# Altium PCB 新主控制.PcbDoc (part 3 of 3)
Units mil, origin at the board's own origin, x right, y up, seen from the top; angles counter-clockwise.
Board outline 9070 x 4900 mil, 2 copper layers (Top Layer, Bottom Layer); 275 components, 202 nets, 862 pads, 116 vias.
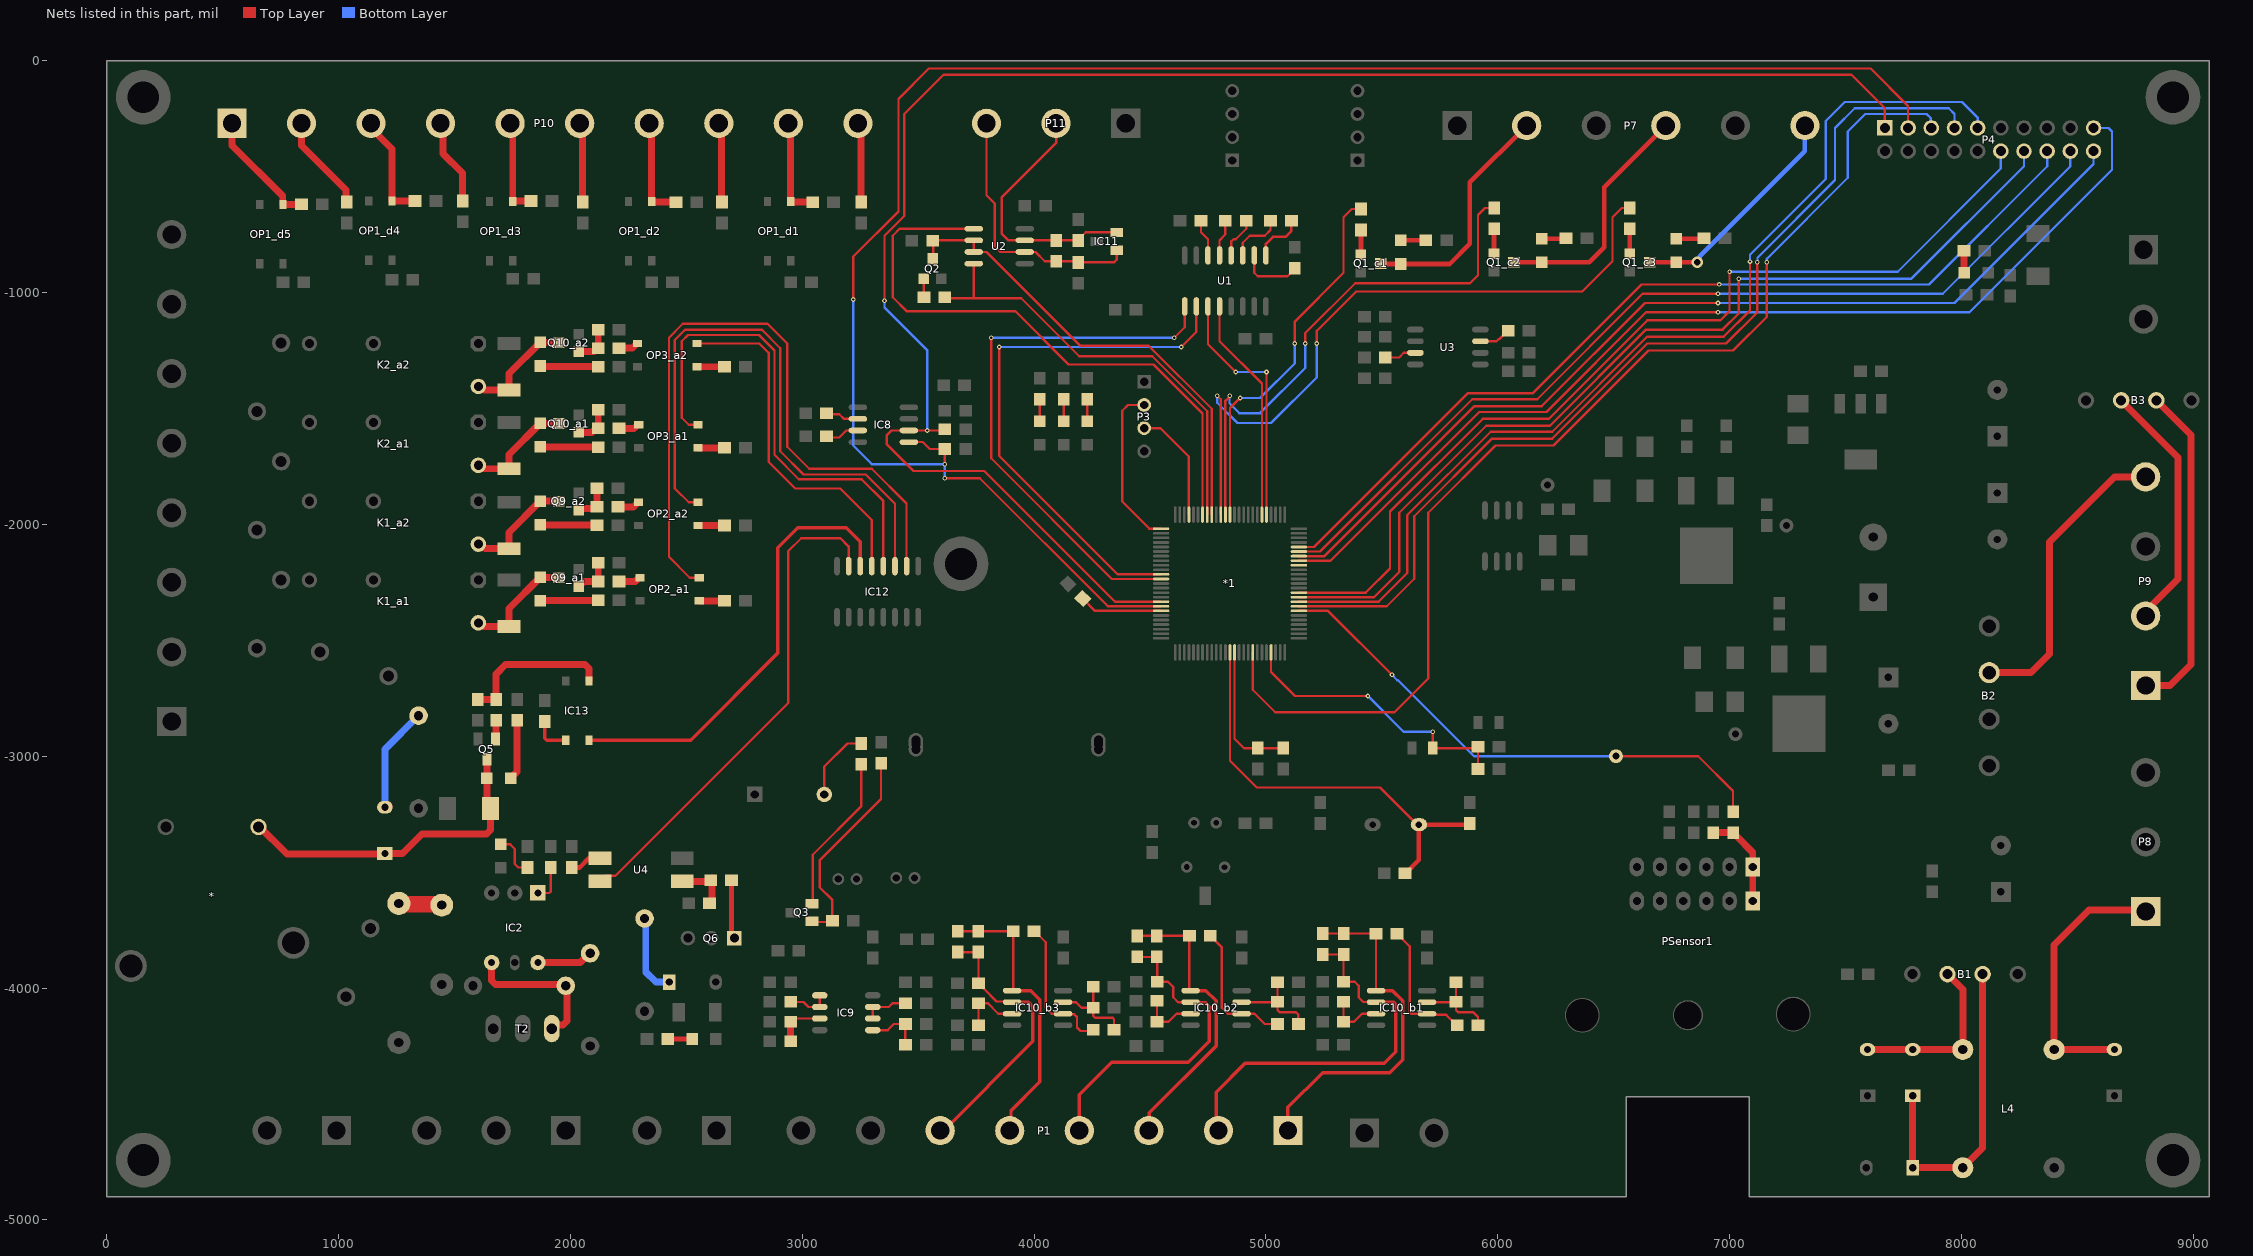
[diagram p3: the nets of this part, all layers, seen from the top]

## Via types
v1: diameter 20, hole 10, Top Layer to Bottom Layer, 92 vias
v2: diameter 50, hole 28, Top Layer to Bottom Layer, 15 vias
v3: diameter 40, hole 20, Top Layer to Bottom Layer, 9 vias

## Nets (pads, with @x,y where several pads share a name; then routed paths per layer and width w, separated by ;. In a path a pad name is that pad's centre, name@x,y a point inside that pad or via, vN(x,y) a via of type N, cw(c..) or ccw(c..) an arc to the next point about the centre after c; other vN are vias at no path point) (continued)
Net*1_13: *1.13 C4.1 R2.2 Y2.2 | length 1862.8
  Top Layer w10: *1.13@4845,-2552.24 4845,-3019.54 4960.46,-3135 5492.13,-3135 5652.13,-3295 Y2.2@5660,-3295
  Top Layer w20: R2.2@5600,-3505 5602.56,-3505 5660,-3447.56 Y2.2@5660,-3295 C4.1@5890,-3295
Net*1_14: *1.14 C5.2 R4.1 | length 600.2
  Top Layer w10: *1.14@4864.68,-2552.24 4864.68,-2924.68 4905.86,-2965.86 4924.14,-2965.86 4925,-2965 C5.2@4965,-2965 R4.1@5075,-2965
Net*1_94: *1.94 R3.2 | length 359.8
  Top Layer w10: R3.2@4210,-2320 4263.11,-2373.11 *1.94@4547.76,-2373.11
Net*_1: *.1 C44.1 D14.1 D15.2 Q5.3 | length 1410.8
  Top Layer w30: *.1@655,-3300 777.5,-3422.5 C44.1@1197.5,-3422.5 ; C44.1@1200,-3420 1275,-3420 1360,-3335 1637.43,-3335 1655,-3317.43 D14.1@1655,-3225 1640,-3210 Q5.3@1640,-3013.06
  Top Layer w50: C44.1@1200,-3420 1202.5,-3417.5 C44.1@1208.46,-3417.5
NetB1_2: B1.2 C15.1 C18.1 L4.4 | length 1396.4
  Top Layer w30: C18.1@7790,-4465 C15.1@7790,-4775 L4.4@8006,-4775 8091.58,-4689.42 B1.2@8091.58,-3940
NetB1_3: B1.3 C18.2 C20.2 L4.3 | length 761.3
  Top Layer w30: C20.2@7595,-4265 C18.2@7790,-4265 ; C18.2@7791,-4266 L4.3@8005,-4266 ; B1.3@7940,-3940 8006,-4006 L4.3@8006,-4265
NetB2_3: B2.3 P9.4 | length 1308.3
  Top Layer w30: B2.3@8120,-2639.61 8300.39,-2639.61 8380,-2560 8380,-2076.14 8661.14,-1795 P9.4@8795,-1795
NetB3_2: B3.2 P9.2 | length 1098.7
  Top Layer w30: B3.2@8689.21,-1465 8935,-1710.79 8935,-2235 P9.2@8774.57,-2395.43
NetB3_3: B3.3 P9.1 | length 1463.2
  Top Layer w15: P9.1@8795,-2695 8802.5,-2695 8810,-2695 P9.1@8820,-2685
  Top Layer w30: P9.1@8795,-2695 8810,-2695 8900,-2695 8990,-2605 8990,-1614.21 B3.3@8840.79,-1465
NetC12_1: C12.1 PSensor1.1 R48.1 | length 437.7
  Top Layer w30: C12.1@6930,-3330 R48.1@7015,-3330 7015,-3332.56 7025,-3342.56 7027.56,-3342.56 7100,-3415 PSensor1.1@7100,-3477.13 ; PSensor1.1@7093.7,-3470.83 PSensor1.1@7100,-3477.13 ; PSensor1.1@7100,-3625 PSensor1.1@7100,-3477.13
  Bottom Layer w30: PSensor1.1@7105,-3615 7105,-3610 PSensor1.1@7110,-3605
NetC17_2: C17.2 L4.1 P8.1 | length 1167.6
  Top Layer w30: C17.2@8660,-4265 L4.1@8400,-4265 8400,-3815 8551.2,-3663.8 P8.1@8795,-3663.8
NetC28_1: C28.1 IC9.3 R18.1 | length 216.4
  Top Layer w10: C28.1@2950,-4145 2963.42,-4131.58 IC9.3@3075.83,-4131.58
  Top Layer w30: R18.1@2950,-4230 C28.1@2950,-4145
NetC31_1: C31.1 IC9.5 R20.1 | length 240.3
  Top Layer w10: IC9.5@3304.17,-4181.57 3368.43,-4181.57 3395,-4155 3442.44,-4155 3445,-4157.56 R20.1@3445,-4245
NetC36_b1_2: C36_b1.2 IC10_b1.7 R22_b1.2 R25_b1.1 | length 388.7
  Top Layer w10: IC10_b1.7@5695,-4060 IC10_b1.7@5695,-4060.88 5819.12,-4060.88 C36_b1.2@5820,-4060 ; R25_b1.1@5820,-3975 C36_b1.2@5820,-4060 ; R22_b1.2@5915,-4160 5915,-4125 5895,-4105 5830,-4105 5820,-4095 C36_b1.2@5820,-4060
NetC36_b2_2: C36_b2.2 IC10_b2.7 R22_b2.2 R25_b2.1 | length 413.6
  Top Layer w10: IC10_b2.7@4895,-4060.88 5049.12,-4060.88 C36_b2.2@5050,-4060 ; R25_b2.1@5050,-3975 C36_b2.2@5050,-4060 ; R22_b2.2@5140,-4155 5140,-4115 5130,-4105 5060,-4105 5050,-4095 C36_b2.2@5050,-4060
NetC36_b3_2: C36_b3.2 IC10_b3.7 R22_b3.2 R25_b3.1 | length 408.6
  Top Layer w10: IC10_b3.7@4125,-4060.88 4180.88,-4060.88 4205,-4085 C36_b3.2@4255,-4085 ; R25_b3.1@4255,-3995 C36_b3.2@4255,-4085 ; R22_b3.2@4345,-4180 4345,-4135 4338.72,-4128.72 4263.72,-4128.72 4255,-4120 C36_b3.2@4255,-4085
  Top Layer w15: IC10_b3.7@4125,-4060.88 IC10_b3.7@4126.72,-4062.6
NetC37_1: C37.1 U1.2 | length 287.2
  Top Layer w10: U1.2@4950,-835 U1.2@4950,-840 4950,-915 4965,-930 5092.56,-930 5120,-902.56 5120,-895 5120,-890 C37.1@5125,-895
NetC39_1: C39.1 U1.3 | length 244.9
  Top Layer w10: U1.3@4900,-840 4905,-840 4900,-835 4900,-785 4930,-755 4995,-755 5020,-730 C39.1@5020,-690
NetC39_2: C39.2 U1.1 | length 227.8
  Top Layer w10: U1.1@5000,-840 5000,-790 5030,-760 5085,-760 5110,-735 C39.2@5110,-690
NetC41_1: C41.1 U1.4 | length 182.8
  Top Layer w10: U1.4@4850,-840 4850,-780 4860,-770 4870,-770 4915,-725 C41.1@4915,-690
NetC41_2: C41.2 U1.5 | length 164.5
  Top Layer w10: U1.5@4800,-840 4800,-830 4795,-825 4800,-820 4800,-775 4825,-750 C41.2@4825,-690
NetC42_1: C42.1 U1.6 | length 162.4
  Top Layer w10: C42.1@4720,-690 4720,-740 4750,-770 U1.6@4750,-840
NetC44_2: C44.2 R56.1 | length 471.1
  Top Layer w50: C44.2@1200,-3220 1204.61,-3220 C44.2@1206.92,-3217.69 ; R56.1@1331.88,-2830 R56.1@1340,-2830
  Bottom Layer w30: C44.2@1200,-3215 1200,-2970 R56.1@1345,-2825
  Bottom Layer w50: C44.2@1200,-3220 C44.2@1200,-3215
NetC47_2: C47.2 R57.1 | length 188.1
  Top Layer w70: R57.1@1260,-3635 1263.79,-3638.79 1441.21,-3638.79 C47.2@1445,-3642.57
NetC51_1: C51.1 R81.1 | length 358
  Top Layer w30: R81.1@2320,-3710 R81.1@2325,-3705 ; C51.1@2426.74,-3974.03 C51.1@2426.74,-3968.07
  Bottom Layer w30: R81.1@2325,-3705 2325,-3930 2369.03,-3974.03 C51.1@2426.74,-3974.03
NetD3_1: D3.1 R40.1 | length 194.5
  Top Layer w10: D3.1@1700,-3380 1740,-3380 1760,-3400 1760,-3465 1775,-3480 R40.1@1815,-3480
NetD6_1: D6.1 R7.1 | length 95.9
  Top Layer w30: R7.1@8010.9,-820 8011.95,-821.05 8011.95,-913.95 D6.1@8013,-915
NetD8_1: D8.1 R14.2 | length 95
  Top Layer w10: D8.1@4127.5,-1555 R14.2@4127.5,-1460
NetD9_1: D9.1 R15.2 | length 95
  Top Layer w10: D9.1@4025,-1555 R15.2@4025,-1460
NetD10_1: D10.1 R16.2 | length 95
  Top Layer w10: D10.1@4230,-1555 R16.2@4230,-1460
NetD11_c1_1: D11_c1.1 R28_c1.1 | length 108.8
  Top Layer w10: D11_c1.1@5581.09,-774.98 D11_c1.1@5589.98,-774.98
  Top Layer w20: D11_c1.1@5590,-775 R28_c1.1@5689.9,-774.98
NetD11_c2_1: D11_c2.1 R28_c2.1 | length 105.7
  Top Layer w15: R28_c2.1@6293.38,-768 R28_c2.1@6295,-766.39
  Top Layer w20: D11_c2.1@6190,-768 R28_c2.1@6293.38,-768
NetD11_c3_1: D11_c3.1 R28_c3.1 | length 133.5
  Top Layer w20: D11_c3.1@6770,-768 6770,-770 6772.81,-767.19 6899.19,-767.19 R28_c3.1@6900,-766.39
NetD15_1: D15.1 R59.1 | length 261.6
  Top Layer w30: D15.1@1742,-3095 1770,-3067 R59.1@1770,-2845
NetD23_1: D23.1 R83.2 | length 105
  Top Layer w20: R83.2@2420,-4220 D23.1@2525,-4220
NetD25_a1_1: D25_a1.1 D26_a1.2 K1_a1.4 Q9_a1.3 | length 488.6
  Top Layer w30: K1_a1.4@1602.76,-2425.04 1612.75,-2425.04 1627.71,-2440 D25_a1.1@1735,-2440 1735,-2363 D26_a1.2@1870,-2228 1878,-2228 1880,-2230 1880,-2229 1949,-2229 Q9_a1.3@1950,-2230
NetD25_a2_1: D25_a2.1 D26_a2.2 K1_a2.4 Q9_a2.3 | length 481.4
  Top Layer w30: K1_a2.4@1602.76,-2085.04 1612.75,-2085.04 1632.71,-2105 D25_a2.1@1735,-2105 1735,-2035 D26_a2.2@1870,-1900 Q9_a2.3@1950,-1900
NetD26_a1_1: D26_a1.1 R86_a1.2 | length 250.8
  Top Layer w30: D26_a1.1@1870,-2330 1871.03,-2328.97 2118.97,-2328.97 R86_a1.2@2120,-2327.95
NetD26_a2_1: D26_a2.1 R86_a2.2 | length 245.7
  Top Layer w30: D26_a2.1@1870,-2002 1870.81,-2002.81 2114.19,-2002.81 R86_a2.2@2115,-2003.61
NetD27_a1_1: D27_a1.1 D28_a1.2 K2_a1.4 Q10_a1.3 | length 471.2
  Top Layer w30: K2_a1.4@1602.76,-1745.04 1612.75,-1745.04 1627.71,-1760 D27_a1.1@1735,-1760 1735,-1698.67 D28_a1.2@1870,-1563.67 1870.67,-1564.33 1949.33,-1564.33 Q10_a1.3@1950,-1565
NetD27_a2_1: D27_a2.1 D28_a2.2 K2_a2.4 Q10_a2.3 | length 479.5
  Top Layer w30: K2_a2.4@1602.76,-1405.04 1612.75,-1405.04 1627.71,-1420 D27_a2.1@1735,-1420 1735,-1350 D28_a2.2@1870,-1215 1870.88,-1215.88 1948.56,-1215.88 Q10_a2.3@1949.44,-1216.76
NetD28_a1_1: D28_a1.1 R91_a1.2 | length 250.7
  Top Layer w30: D28_a1.1@1870,-1665.67 1870.81,-1666.47 2119.19,-1666.47 R91_a1.2@2120,-1667.28
NetD28_a2_1: D28_a2.1 R91_a2.2 | length 251.2
  Top Layer w30: D28_a2.1@1870,-1317 1871.5,-1318.5 2118.5,-1318.5 R91_a2.2@2120,-1320
NetFM1_1: FM1.1 R1.2 | length 321.4
  Top Layer w10: FM1.1@3095,-3165 3095,-3045 3195,-2945 R1.2@3255,-2945
NetIC2_1: IC2.1 R39.2 | length 161.6
  Top Layer w10: IC2.1@1860,-3590 1909.14,-3590 1915,-3584.14 R39.2@1915,-3480
NetIC2_4: IC2.4 R41.1 T2.3 | length 622
  Top Layer w30: IC2.4@1660,-3890 1660,-3967.43 1677.57,-3985 R41.1@1959.64,-3985 ; T2.3@1920,-4175 1930,-4175 1930,-4167.09 1937.09,-4160 1967.43,-4160 1985,-4142.43 1985,-3995 R41.1@1980,-3990
NetIC2_6: IC2.6 R38.2 | length 254.3
  Top Layer w30: IC2.6@1860,-3890 2042.43,-3890 2077.43,-3855 R38.2@2099.79,-3855
NetIC8_2: IC8.2 R10.2 | length 145.4
  Top Layer w10: R10.2@3105,-1520 3110,-1525 3160,-1525 3180,-1545 IC8.2@3240,-1545
NetIC8_3: IC8.3 R9.2 | length 149.5
  Top Layer w10: R9.2@3105,-1620 3110,-1625 3160,-1625 3190,-1595 IC8.3@3240,-1595
NetIC9_1: IC9.1 IC9.2 R17.1 | length 184.8
  Top Layer w10: R17.1@2950,-4060 3005,-4060 3026.58,-4081.58 IC9.2@3075.83,-4081.58 IC9.1@3075.83,-4031.58
NetIC9_6: IC9.6 IC9.7 R19.1 | length 197.7
  Top Layer w10: IC9.6@3304.17,-4131.58 IC9.7@3304.17,-4081.58 3373.42,-4081.58 3390,-4065 R19.1@3445,-4065
NetIC10_b1_3: IC10_b1.3 R26_b1.2 R27_b1.1 | length 244.5
  Top Layer w10: R26_b1.2@5335,-4060 R27_b1.1@5335,-4145 5380,-4145 5414.12,-4110.88 IC10_b1.3@5475,-4110.88 5479.12,-4110.88 IC10_b1.3@5480,-4110
NetIC10_b1_6: IC10_b1.6 R22_b1.1 R24_b1.2 | length 594.2
  Top Layer w10: R24_b1.2@5565,-3765 5620,-3820 5620,-4105.02 5625.86,-4110.88 IC10_b1.6@5695,-4110.88 5695,-4115 5696.44,-4113.56 5729.47,-4113.56 5730.91,-4115 5777.44,-4115 5822.44,-4160 R22_b1.1@5825,-4160
NetIC10_b2_3: IC10_b2.3 R26_b2.2 R27_b2.1 | length 249.9
  Top Layer w10: R26_b2.2@4530,-4055 R27_b2.1@4530,-4145 4580,-4145 4614.12,-4110.88 4669.12,-4110.88 4670,-4110 4670.88,-4110.88 IC10_b2.3@4675,-4110.88
NetIC10_b2_6: IC10_b2.6 R22_b2.1 R24_b2.2 | length 600.4
  Top Layer w10: R24_b2.2@4760,-3775 4810,-3825 4810,-4085.02 4835.86,-4110.88 IC10_b2.6@4895,-4110.88 4899.12,-4110.88 4900,-4110 4900.88,-4110.88 4950.88,-4110.88 4995,-4155 R22_b2.1@5050,-4155
NetIC10_b3_3: IC10_b3.3 R26_b3.2 R27_b3.1 | length 259
  Top Layer w10: R27_b3.1@3760,-4160 3760,-4070 R26_b3.2@3760,-4065 3800,-4065 3845.88,-4110.88 IC10_b3.3@3905,-4110.88
NetIC10_b3_6: IC10_b3.6 R22_b3.1 R24_b3.2 | length 627.1
  Top Layer w10: R24_b3.2@4000,-3755 4002.56,-3755 4050.5,-3802.94 4050.5,-4085.5 4075.88,-4110.88 IC10_b3.6@4125,-4110.88 4127.68,-4113.56 4173.56,-4113.56 4185,-4125 4185,-4170 4200,-4185 4250,-4185 R22_b3.1@4255,-4180
NetIC13_1: IC13.1 R61.2 | length 165.8
  Top Layer w15: R61.2@1890,-2850 1890,-2922.12 1898.79,-2930.91 IC13.1@1980,-2930.91
NetIC13_3: IC13.3 R63.1 R80.1 | length 666.3
  Top Layer w30: R80.1@1600,-2755 R63.1@1680,-2755 1680,-2645 1720,-2605 2062.43,-2605 2080,-2622.57 IC13.3@2080,-2675
NetOP2_a1_1: OP2_a1.1 R88_a1.2 | length 109.1
  Top Layer w30: OP2_a1.1@2555.91,-2330 R88_a1.2@2665,-2330
NetOP2_a1_3: OP2_a1.3 R89_a1.1 | length 96.8
  Top Layer w30: R89_a1.1@2210,-2246.47 2279.59,-2246.47 2296.06,-2230 OP2_a1.3@2300,-2230
NetOP2_a2_1: OP2_a2.1 R88_a2.2 | length 115
  Top Layer w30: OP2_a2.1@2550,-2005 R88_a2.2@2665,-2005
NetOP2_a2_3: OP2_a2.3 R89_a2.1 | length 97.7
  Top Layer w30: R89_a2.1@2205,-1924.31 2271.84,-1924.31 2289.41,-1906.73 2289.41,-1905.75 2290.16,-1905 OP2_a2.3@2294.09,-1905
NetOP3_a1_1: OP3_a1.1 R93_a1.2 | length 104.1
  Top Layer w30: OP3_a1.1@2550.91,-1670 R93_a1.2@2655,-1670
NetOP3_a1_3: OP3_a1.3 R94_a1.1 | length 91.7
  Top Layer w30: R94_a1.1@2210,-1586.14 2274.92,-1586.14 2291.06,-1570 OP3_a1.3@2295,-1570
NetOP3_a2_1: OP3_a2.1 R93_a2.2 | length 129.9
  Top Layer w30: OP3_a2.1@2545.91,-1320 R93_a2.2@2675.8,-1320
NetOP3_a2_3: OP3_a2.3 R94_a2.1 | length 89.3
  Top Layer w30: R94_a2.1@2210,-1240 2267.74,-1240 2285.31,-1222.43 2285.31,-1220.75 2286.06,-1220 OP3_a2.3@2290,-1220
NetQ1_c1_1: Q1_c1.1 R29_c1.2 | length 107.4
  Top Layer w10: Q1_c1.1@5409,-837 Q1_c1.1@5410,-836
  Top Layer w20: Q1_c1.1@5410,-836 R29_c1.2@5410,-730
NetQ1_c2_1: Q1_c2.1 R29_c2.2 | length 111.6
  Top Layer w10: R29_c2.2@5984,-736 5990,-730 R29_c2.2@5985,-725
  Top Layer w20: Q1_c2.1@5984,-832 R29_c2.2@5984,-736
NetQ1_c3_1: Q1_c3.1 R29_c3.2 | length 107.4
  Top Layer w20: Q1_c3.1@6569,-832 6569.5,-831.5 6569.5,-725.5 R29_c3.2@6570,-725
NetQ2_1: Q2.1 R35.2 | length 84.9
  Top Layer w10: R35.2@3520,-1020 R35.2@3525,-1020 3524.78,-1019.78 Q2.1@3524.78,-940.23
NetQ3_1: Q3.1 R8.1 R49.1 | length 899.6
  Top Layer w10: Q3.1@3045,-3715 3125,-3715 R49.1@3130,-3710 3130,-3620 3075,-3565 3075,-3450 3340,-3185 R8.1@3340,-3030
NetQ3_2: Q3.2 R1.1 | length 691
  Top Layer w10: Q3.2@3045,-3639 3045,-3425 3255,-3215 R1.1@3255,-3035
NetQ5_1: Q5.1 R63.2 | length 84.7
  Top Layer w30: Q5.1@1677,-2926.06 1678.94,-2926.06 1680,-2925 1678.5,-2923.5 1678.5,-2846.5 R63.2@1680,-2845
NetQ6_1: Q6.1 R84.1 | length 254.5
  Top Layer w20: R84.1@2695,-3535 2695,-3772.32 Q6.1@2707.14,-3784.46
NetQ9_a1_1: Q9_a1.1 R89_a1.2 R90_a1.2 | length 174.4
  Top Layer w30: Q9_a1.1@2036,-2268 2057.53,-2246.47 R89_a1.2@2120,-2246.47 R90_a1.2@2120,-2165
NetQ9_a2_1: Q9_a2.1 R89_a2.2 R90_a2.2 | length 164
  Top Layer w30: Q9_a2.1@2036,-1938 2042.85,-1931.15 2108.15,-1931.15 R89_a2.2@2115,-1924.31 R90_a2.2@2115,-1845
NetQ10_a1_1: Q10_a1.1 R94_a1.2 R95_a1.2 | length 172.1
  Top Layer w30: Q10_a1.1@2036,-1603 2092,-1603 2098.86,-1596.14 2110,-1596.14 R94_a1.2@2120,-1586.14 R95_a1.2@2120,-1505
NetQ10_a2_1: Q10_a2.1 R94_a2.2 R95_a2.2 | length 170.7
  Top Layer w30: Q10_a2.1@2035.44,-1254.76 2102.68,-1254.76 2117.44,-1240 R94_a2.2@2120,-1240 R95_a2.2@2120,-1160
NetR44_2: R44.2 U3.7 | length 137.9
  Top Layer w10: R44.2@5515,-1280 5575,-1280 5595,-1260 U3.7@5644.61,-1260
NetR45_2: R45.2 U3.3 | length 138.2
  Top Layer w10: U3.3@5925.39,-1210 5995,-1210 6005,-1200 6007.44,-1200 6042.44,-1165 R45.2@6045,-1165
NetR82_2: R82.2 U4.1 | length 141.9
  Top Layer w10: U4.1@2127.83,-3440 U4.1@2129.57,-3438.27
  Top Layer w20: R82.2@2005,-3480 2040,-3480 2080,-3440 U4.1@2127.83,-3440
NetR84_2: R84.2 R85.1 U4.3 | length 248.2
  Top Layer w30: U4.3@2482.17,-3540 2595,-3540 2610,-3525 2610,-3625 R85.1@2600,-3635
OUT_DRLOCK: IC12.15 U4.2 | length 2168.2
  Top Layer w10: U4.2@2127.83,-3540 2152.36,-3515.47 2194.53,-3515.47 2940,-2770 2940,-2115.4 2995.4,-2060 3165,-2060 3200,-2095 IC12.15@3200,-2180
PT_A1: C33_b1.1 IC10_b1.1 P1.1 R21_b1.1 R24_b1.1 | length 1544.1
  Top Layer w10: C33_b1.1@5245,-3765 R21_b1.1@5335,-3765 R24_b1.1@5475,-3765 5475,-4010 IC10_b1.1@5475,-4010.88
  Top Layer w15: P1.1@5095,-4615 5095,-4585 5095,-4515 5245,-4365 5535,-4365 5590,-4310 5590,-4055 5545.88,-4010.88 IC10_b1.1@5475,-4010.88
PT_A2: C33_b2.1 IC10_b2.1 P1.3 R21_b2.1 R24_b2.1 | length 1271.3
  Top Layer w10: C33_b2.1@4445,-3775 R21_b2.1@4530,-3775 R24_b2.1@4670,-3775 4670,-4005.88 IC10_b2.1@4675,-4010.88
  Top Layer w15: P1.3@4495,-4615 4496.71,-4613.29 4496.71,-4538.29 4785,-4250 4785,-4055 4740.88,-4010.88 IC10_b2.1@4675,-4010.88
PT_A3: C33_b3.1 IC10_b3.1 P1.5 R21_b3.1 R24_b3.1 | length 1253
  Top Layer w10: C33_b3.1@3670,-3755 R21_b3.1@3760,-3755 R24_b3.1@3910,-3755 3910,-4005.88 IC10_b3.1@3905,-4010.88
  Top Layer w15: P1.5@3895,-4615 3900.49,-4609.51 3900.49,-4529.51 4025,-4405 4025,-4050 3985.88,-4010.88 IC10_b3.1@3905,-4010.88
PT_B1: C33_b1.2 IC10_b1.2 P1.2 R21_b1.2 R23_b1.2 | length 1728.9
  Top Layer w10: C33_b1.2@5245,-3855 R21_b1.2@5335,-3855 R23_b1.2@5335,-3972.88 5382.88,-3972.88 5400,-3990 5400,-4040 5420,-4060 5475,-4060 IC10_b1.2@5475,-4060.88
  Top Layer w15: P1.2@4795,-4615 4795,-4595 4800,-4590 4785,-4575 4785,-4450 4910,-4325 5510,-4325 5560,-4275 5560,-4069.67 5551.21,-4060.88 IC10_b1.2@5475,-4060.88
PT_B2: C33_b2.2 IC10_b2.2 P1.4 R21_b2.2 R23_b2.2 | length 1457.9
  Top Layer w10: C33_b2.2@4445,-3865 4445.9,-3865.91 R21_b2.2@4530.9,-3865.91 ; R21_b2.2@4530,-3865 R21_b2.2@4530.9,-3865.91 ; IC10_b2.2@4675,-4060.88 4620.88,-4060.88 4600,-4040 4600,-3995 4577.88,-3972.88 R23_b2.2@4530.9,-3972.88 R21_b2.2@4530.9,-3865.91
  Top Layer w15: P1.4@4195,-4615 4195,-4590 4205,-4580 4195,-4570 4195,-4460 4335,-4320 4665,-4320 4755,-4230 4755,-4080 4737.5,-4062.5 4676.62,-4062.5 IC10_b2.2@4675,-4060.88
PT_B3: C33_b3.2 IC10_b3.2 P1.6 R21_b3.2 R23_b3.2 | length 1209.8
  Top Layer w10: C33_b3.2@3670,-3845 R21_b3.2@3760,-3845 R23_b3.2@3760,-3977.44 ; R23_b3.2@3760,-3980 3762.56,-3980 3782.56,-4000 3782.56,-4002.56 3838.2,-4058.2 3902.32,-4058.2 IC10_b3.2@3905,-4060.88
  Top Layer w15: P1.6@3595,-4615 3610,-4615 3995,-4230 3995,-4080 3975.88,-4060.88 IC10_b3.2@3905,-4060.88
relay_out1: *1.43 P4.19 | length 4457.6
  Top Layer w10: *1.43@5142.24,-2156.57 5278.43,-2156.57 5920,-1515 6210,-1515 6640,-1085 v1(6950,-1085)
  Bottom Layer w10: v1(6950,-1085) 8035,-1085 8650,-470 8650,-305 8635,-290 P4.19@8570,-290
relay_out2: *1.44 P4.20 | length 4183.6
  Top Layer w10: *1.44@5142.24,-2136.89 5253.11,-2136.89 5900,-1490 6190,-1490 6635,-1045 v1(6950,-1045)
  Bottom Layer w10: v1(6950,-1045) 7970,-1045 8570,-445 P4.20@8570,-390
relay_out3: *1.45 P4.18 | length 4080.4
  Top Layer w10: *1.45@5142.24,-2117.2 5232.8,-2117.2 5890,-1460 6170,-1460 6625,-1005 v1(6950,-1005)
  Bottom Layer w10: v1@6950.86,-1005 7920,-1005 8470,-455 P4.18@8470,-390
relay_out4: *1.46 P4.16 | length 3973.1
  Top Layer w10: *1.46@5142.24,-2097.52 5207.48,-2097.52 5870,-1435 6150,-1435 6620,-965 v1(6955,-965)
  Bottom Layer w10: v1(6955,-965) 7860,-965 8370,-455 P4.16@8370,-390
relay_out5: *1.35 P4.14 | length 4200
  Top Layer w10: *1.35@5142.24,-2314.06 5465.94,-2314.06 5575,-2205 5575,-1950 5950,-1575 6225,-1575 6640,-1160 6970,-1160 7040,-1090 v1(7040,-940)
  Bottom Layer w10: v1(7040,-940) 7785,-940 8270,-455 P4.14@8270,-390
relay_out6: *1.36 P4.12 | length 4103.6
  Top Layer w10: *1.36@5142.24,-2294.37 5430.63,-2294.37 5535,-2190 5535,-1945 5935,-1545 6220,-1545 6645,-1120 6960,-1120 7000,-1080 v1(7000,-910)
  Bottom Layer w10: v1(7000,-910) 7725,-910 8170,-465 P4.12@8170,-390
RelayA1: IC12.10 OP2_a1.2 | length 3014.7
  Top Layer w10: OP2_a1.2@2555.91,-2230 2515,-2230 2425,-2140 2425,-1195 2485,-1135 2850,-1135 2935,-1220 2935,-1665 3030,-1760 3300,-1760 3450,-1910 IC12.10@3450,-2180
RelayA2: IC12.11 OP2_a2.2 | length 2574.3
  Top Layer w10: OP2_a2.2@2550,-1905 2510,-1905 2450,-1845 2450,-1205 2495,-1160 2825,-1160 2905,-1240 2905,-1685 3005,-1785 3274.14,-1785 3400,-1910.86 IC12.11@3400,-2180
RelayB1: IC12.12 OP3_a1.2 | length 2135.8
  Top Layer w10: OP3_a1.2@2550.91,-1570 2510,-1570 2480,-1540 2480,-1210 2507,-1183 2813,-1183 2880,-1250 2880,-1700 2985,-1805 3256.14,-1805 3350,-1898.86 IC12.12@3350,-2180
RelayB2: IC12.13 OP3_a2.2 | length 1543.5
  Top Layer w10: OP3_a2.2@2545.91,-1220 2815,-1220 2855,-1260 2855,-1730 2970,-1845 3163.72,-1845 3300,-1981.28 IC12.13@3300,-2180
RelayC4: *1.42
RS485_A: IC11.1 P11.3 R33.2 R36.1 U2.6 | length 1146.5
  Top Layer w10: P11.3@3795,-270 3795,-580.59 3830,-615.59 3830,-800 3855,-825 U2.6@3960,-825 3960.16,-825.16 4006.02,-825.16 4045.86,-865 R33.2@4095,-865 4185,-865 R36.1@4190,-870 4345,-870 4357,-858 IC11.1@4357,-817
RS485_B: IC11.2 P11.2 R32.2 R33.1 U2.7 | length 1098.2
  Top Layer w10: P11.2@4095,-270 4095,-355 3860,-590 3860,-745 3890,-775 U2.7@3960,-775 R33.1@4095,-775 R32.2@4190,-775 4190,-772.44 4222.44,-740 4355,-740 4356,-741 IC11.2@4357,-741
RS485_DE/R\E\: *1.67 Q2.3 R34.1 U2.2 U2.3 | length 2068.7
  Top Layer w10: Q2.3@3562.78,-854.23 3565,-852.01 3565,-780 3562.78,-777.78 R34.1@3562.78,-776.08 ; R34.1@3565.85,-779.15 3570,-775 U2.2@3740,-775 U2.3@3740,-825 3795,-825 3810,-840 4200,-1230 4495,-1230 4766.26,-1501.26 *1.67@4766.26,-1957.76
RXD1: *1.69 U2.1 | length 2608.1
  Top Layer w10: U2.1@3740,-725 3420,-725 3390,-755 3390,-1020 3450,-1080 3918.63,-1080 4148.63,-1310 4515,-1310 4726.89,-1521.89 *1.69@4726.89,-1957.76
RXD2: *1.87 U1.9 | length 2411.9
  Top Layer w10: v1(3815,-1195) 3815,-1715 4335.31,-2235.31 *1.87@4547.76,-2235.31 ; v1(4605,-1195) 4650,-1150 U1.9@4650,-1060
  Bottom Layer w10: v1(3815,-1195) v1(4605,-1195)
RXD3: *1.56 U1.12 | length 973.5
  Top Layer w10: U1.12@4800,-1060 4800,-1210 4982.8,-1392.8 *1.56@4982.8,-1957.76
SCLK: *1.92 IC8.6 P4.1 R12.2 | length 7686.5
  Top Layer w10: v1(3355,-1035) 3355,-755 3440,-670 3440,-230 3610,-60 5770,-60 7525,-60 7670,-205 P4.1@7670,-290 ; R12.2@3615,-1590 3610,-1595 v1(3539.75,-1595) IC8.6@3460,-1595 3385,-1595 3365,-1615 3365,-1655 3480,-1770 3785,-1770 4348.74,-2333.74 *1.92@4547.76,-2333.74
  Bottom Layer w10: v1(3355,-1035) 3355,-1065 3539.75,-1249.75 v1(3539.75,-1595)
SDA: *1.93 IC8.5 P4.3 R13.2 | length 8039.9
  Top Layer w10: v1(3220,-1030) 3220,-845 3415,-650 3415,-165 3546.06,-33.94 7608.94,-33.94 7770,-195 P4.3@7770,-290 ; IC8.5@3460,-1645 3520,-1645 3550,-1675 R13.2@3615,-1675 v1(3615,-1740) ; v1(3615,-1801) 3766,-1801 4318.43,-2353.43 *1.93@4547.76,-2353.43
  Bottom Layer w10: v1(3220,-1030) 3220,-1660 3300,-1740 v1(3615,-1740) v1(3615,-1801) ; P4.3@7770,-290 P4.3@7770,-280
SI_A1: P10.10 R30_d1.2 | length 340
  Top Layer w30: R30_d1.2@3252.5,-610 P10.10@3252.5,-270
SI_A2: P10.8 R30_d2.2 | length 340
  Top Layer w30: R30_d2.2@2651.88,-610 P10.8@2651.88,-270
SI_A3: P10.6 R30_d3.2 | length 338.8
  Top Layer w30: R30_d3.2@2052.5,-610 P10.6@2052.5,-271.25
SI_A4: P10.4 R30_d4.2 | length 368.4
  Top Layer w30: P10.4@1451.25,-271.25 1451.25,-401.25 1535,-485 R30_d4.2@1535,-605
SI_A5: P10.2 R30_d5.2 | length 420.8
  Top Layer w30: P10.2@840,-270 840,-365 1031.9,-556.9 1031.9,-606.9 R30_d5.2@1035,-610
SI_B1: OP1_d1.1 P10.9 R51_d1.1 | length 434.6
  Top Layer w30: P10.9@2950,-270 OP1_d1.1@2950,-607.06 2950,-609.25 2950.75,-610 R51_d1.1@3045,-610
SI_B2: OP1_d2.1 P10.7 R51_d2.1 | length 443.4
  Top Layer w30: P10.7@2350.3,-270 2350.3,-606.76 OP1_d2.1@2350.46,-606.91 ; OP1_d2.1@2350.61,-607.06 OP1_d2.1@2350.46,-606.91 ; R51_d2.1@2455,-610 2453.53,-608.53 2351.35,-608.53 2350.46,-607.63 OP1_d2.1@2350.46,-606.91
SI_B3: OP1_d3.1 P10.5 R51_d3.1 | length 421.2
  Top Layer w30: P10.5@1740,-270 1751.21,-281.21 OP1_d3.1@1751.21,-606.78 ; OP1_d3.1@1751.21,-607.06 OP1_d3.1@1751.21,-606.78 ; R51_d3.1@1830,-605 1828.97,-606.03 1751.96,-606.03 OP1_d3.1@1751.21,-606.78
SI_B4: OP1_d4.1 P10.3 R51_d4.1 | length 472.3
  Top Layer w30: P10.3@1140,-270 1140,-290.57 1230,-380.57 OP1_d4.1@1230,-605 R51_d4.1@1330,-605
SI_B5: OP1_d5.1 P10.1 R51_d5.1 | length 521.1
  Top Layer w30: P10.1@540,-270 540,-365 759.25,-584.25 759.25,-619.25 OP1_d5.1@760,-620 R51_d5.1@840,-620
SSR1: *1.63 R29_c1.1 | length 1626.4
  Top Layer w10: *1.63@4845,-1957.76 4845,-1497.71 4887.71,-1455 v1(4890,-1455) ; v1(5125,-1220) 5125,-1125 5335,-915 5335,-675 5370,-640 R29_c1.1@5410,-640
  Bottom Layer w10: v1(4890,-1455) 4975,-1455 5125,-1305 v1(5125,-1220)
SSR2: *1.64 R29_c2.1 | length 2320
  Top Layer w10: *1.64@4825.31,-1957.76 4825.31,-1467.39 4844.61,-1448.1 v1(4844.61,-1445.39) ; v1(5170,-1220) 5170,-1175 5385,-960 5880,-960 5915,-925 5915,-665 5945,-635 R29_c2.1@5985,-635
  Bottom Layer w10: v1(4844.61,-1445.39) 4842.7,-1447.3 4842.7,-1477.7 4885,-1520 4975,-1520 5170,-1325 v1(5170,-1220)
SSR3: *1.65 R29_c3.1 | length 2978.2
  Top Layer w10: v1(4790,-1445) 4805.63,-1460.63 *1.65@4805.63,-1957.76 ; v1(5220,-1220) 5220,-1165 5389.77,-995.23 6364.77,-995.23 6495,-865 6495,-675 6535,-635 R29_c3.1@6570,-635
  Bottom Layer w10: v1(4790,-1445) 4790,-1475 4877.65,-1562.65 5022.35,-1562.65 5220,-1365 v1(5220,-1220)
SSR-1: D11_c1.2 P7.2 Q1_c1.3 | length 1033.3
  Top Layer w10: Q1_c1.3@5495,-875 Q1_c1.3@5496.98,-876.98
  Top Layer w20: Q1_c1.3@5496.98,-876.98 D11_c1.2@5581.09,-876.98 5793.02,-876.98 5880,-790 5880,-525 P7.2@6125,-280
SSR-2: D11_c2.2 P7.4 Q1_c2.3 | length 1051.7
  Top Layer w20: Q1_c2.3@6070,-870 D11_c2.2@6190,-870 6395,-870 6460,-805 6460,-545 P7.4@6725,-280
SSR-3: D11_c3.2 P7.6 Q1_c3.3 | length 987.6
  Top Layer w20: Q1_c3.3@6655,-870 v2(6860,-870)
  Bottom Layer w20: v2(6860,-870) 6860,-861.88 6871.39,-850.49 6871.39,-843.61 7325,-390 P7.6@7325,-280
TCK: *1.76 P3.2 | length 713.2
  Top Layer w10: P3.2@4475,-1485 4405,-1485 4380,-1510 4380,-1901.46 4497.32,-2018.78 *1.76@4547.76,-2018.78
TMS: *1.72 P3.3 | length 493.6
  Top Layer w10: P3.3@4475,-1585 4545,-1585 4667.83,-1707.83 *1.72@4667.83,-1957.76
TXD1: *1.68 R35.1 U2.4 | length 1931.4
  Top Layer w10: R35.1@3615,-1020 3620,-1025 3740,-1025 ; U2.4@3740,-875 3740,-1025 ; *1.68@4746.57,-1957.76 4746.57,-1511.57 4510,-1275 4195,-1275 3945,-1025 3740,-1025
TXD2: *1.86 U1.10 | length 2366.2
  Top Layer w10: v1(3850,-1235) 3850,-1705 4360.63,-2215.63 *1.86@4547.76,-2215.63 ; v1(4635,-1235) 4700,-1170 U1.10@4700,-1060
  Bottom Layer w10: v1(3850,-1235) v1(4635,-1235)
TXD3: *1.55 U1.11 | length 1080.1
  Top Layer w10: U1.11@4750,-1060 4750,-1223 v1(4870,-1343) ; *1.55@5002.48,-1957.76 v1(5002.48,-1342.87)
  Bottom Layer w10: v1(4870,-1343) 4870.07,-1342.93 5002.41,-1342.93 v1(5002.48,-1342.87)
UV_ADC1: *1.18 P4.5 | length 4927.2
  Top Layer w10: *1.18@4943.43,-2552.24 4943.43,-2713.43 5040,-2810 5555,-2810 5700,-2665 5700,-1950 5990,-1660 6240,-1660 6650,-1250 7015,-1250 7160,-1105 v1(7160,-870)
  Bottom Layer w10: v1(7160,-870) 7160.18,-869.82 7160.18,-854.82 7510,-505 7510,-305 7585,-230 7850,-230 7867.39,-247.39 7867.39,-287.39 P4.5@7870,-290
UV_ADC2: *1.33 P4.7 | length 4215.6
  Top Layer w10: *1.33@5142.24,-2353.43 5521.57,-2353.43 5640,-2235 5640,-1965 5975,-1630 6235,-1630 6645,-1220 6985,-1220 7120,-1085 v1(7120,-870)
  Bottom Layer w10: v1(7120,-870) 7120.18,-869.82 7120.18,-849.82 7455,-515 7455,-290 7540,-205 7945,-205 7970,-230 P4.7@7970,-290
UV_ADC3: *1.34 P4.9 | length 4326.9
  Top Layer w10: *1.34@5142.24,-2333.74 5486.26,-2333.74 5610,-2210 5610,-1960 5970,-1600 6235,-1600 6645,-1190 6975,-1190 7088,-1077 v1(7088,-866.42)
  Bottom Layer w10: v1(7088,-866.42) 7088,-837 7415,-510 7415,-260 7497,-178 8003,-178 8070,-245 P4.9@8070,-290
VDDA: *1.22 C6.2 C7.1 L1.2 | length 1249.8
  Top Layer w10: *1.22@5022.17,-2552.24 5022.17,-2636.25 5125.91,-2740 5394.09,-2740 v1(5440,-2740) ; v1(5720,-2895) L1.2@5720,-2965 5910,-2965 C6.2@5915,-2960 ; C7.1@5915,-3063.69 C6.2@5915,-2970
  Bottom Layer w10: v1(5440,-2740) 5595,-2895 v1(5720,-2895)
YL: *1.32 R48.2 YL1.1 | length 2287.2
  Top Layer w10: *1.32@5142.24,-2373.11 5268.11,-2373.11 v1(5543.74,-2648.74) ; YL1.1@6510,-3000 6865,-3000 7015,-3150 R48.2@7015,-3240
  Bottom Layer w10: v1(5543.74,-2648.74) 5567,-2672 5569.53,-2672 5897.53,-3000 YL1.1@6512.64,-3000
YSJ: IC12.14 IC13.2 | length 1945.8
  Top Layer w15: IC13.2@2080,-2930.91 2519.09,-2930.91 2895,-2555 2895,-2100 2980,-2015 3190,-2015 3250,-2075 IC12.14@3250,-2180
pads on no net: 2.2 *1.4 *1.7 *1.26 *1.31 *1.37 *1.38 *1.39 *1.47 *1.48 *1.60 *1.61 *1.62 *1.70 *1.71 *1.73 *1.77 *1.78 *1.79 *1.80 *1.83 *1.89 *1.90 *1.91 *1.96 C24.1 IC2.3 IC2.5 IC4.4 IC4.5 IC5.4 IC12.9 PSensor1. PSensor1.4 PSensor1.5 PSensor1.6 Y1.3 Y1.4 Y1.5

## Polygon pours and split planes (outlines as drawn)
AGND on Top Layer "AGND_L01_P000" (solid, remove dead copper, pour order 0): 2743.31,-4891.69 2743.31,-3375.83 3577.13,-3390 3577.13,-3595 5953.31,-3625.83 5953.31,-1446.69 7108.31,-1446.69 7108.31,-1801.69 7858.31,-1801.69 7858.31,-561.69 9048.31,-561.69 9053.31,-566.69 9053.31,-4891.69
DGND on Top Layer "DGND_L01_P001" (solid, remove dead copper, pour order 1): 0,10.89 9060,10.89 9060,-539.11 7850,-539.11 7850,-1779.11 7170,-1779.11 7170,-1414.11 5950,-1414.11 5950,-3584.11 3587.86,-3576.97 3590,-3379.11 2755,-3365 2775,-1069.11 0,-1069.11
+24V on Top Layer "+24V_L01_P004" (solid, remove dead copper, pour order 4): 6115,-4485 6115,-4760 6345,-4760 6345,-4485
DGND on Bottom Layer "DGND_L02_P002" (solid, remove dead copper, pour order 2): 2760,-10 2760,-4900 7730,-4900 7730,-10

## Keep-outs
Keep-Out Layer:
  lines w0.5: 0,-4900 6555,-4900 6555,-4470 7085,-4470 7085,-4900 9070,-4900 9070,0 0,0 0,-4900
  lines w5: 110,-1155 110,-1155 ; 110,-1155 105,-1150 105,-1140 110,-1135 1330,-1135 1335,-1140 1335,-1150 1330,-1155 110,-1155 ; 35,-3005 35,-2995 45,-2985 1120,-2985 1130,-2995 1130,-3005 1120,-3015 45,-3015 35,-3005 ; 1295,-2730 1305,-2740 1330,-2740 1340,-2730 1340,-1215 1330,-1205 1305,-1205 1295,-1215 1295,-2730 ; 1575,-3715 1620,-3760 2025,-3760 2030,-3755 2030,-3735 2025,-3730 1635,-3730 1605,-3700 1605,-3495 1600,-3490 1580,-3490 1575,-3495 1575,-3715 ; 2150,-4860 2160,-4870 2180,-4870 2190,-4860 2190,-3735 2180,-3725 2160,-3725 2150,-3735 2150,-4860
  lines w8: 350,-3480 135,-3480 ccw(c135,-3500) 135,-3520 365,-3520 ; 350,-3480 350,-3480 ; 350,-3480 1530,-3480 1540,-3490 1540,-3510 1530,-3520 365,-3520 ; 365,-3520 365,-3520

## Other copper
Top Layer:
  rectangle net +24VDD: 2520,-3450 2645,-3305
Bottom Layer:
  rectangle net +24VDD: 2520,-3450 2645,-3305

## Silkscreen, mask and mechanical layers (free items; w line width, h text height)
Top Overlay:
  text "TXD" at 4970,-150 h60
  text "DGND" at 5115,-150 h60
  text "触摸屏" at 5520,-185 h80 r270
  text "RXD" at 4975,-250 h60
  text "打印机" at 4990,-260 h100 r270
  text "RXD" at 5160,-260 h60
  text "TXD" at 5160,-355 h60
  text "DGND" at 4580,-450 h60
  text "＋24V" at 5145,-455 h50
  text "继电器24v" at -5,-538.82 h90
  text "RESET" at 4175,-599.29 h60
  text "485A" at 3590,-609.29 h60
  text "485B" at 3780,-609.29 h60
  text "+5V" at 5680,-617.69 h100
  text "+5V" at 6330,-617.69 h100
  text "+5V" at 6935,-617.69 h100
  text "SSR1" at 6050,-618.81 h100
  text "SSR2" at 6615,-618.81 h100
  text "SSR3" at 7200,-618.81 h100
  text "AGND" at 8485,-960 h100 r90
  text "低水位" at 1840,-1080 h100
  text "高水位" at 2455,-1080 h100
  text "门检测" at 1265,-1085 h100
  text "预留2" at 2915,-1085 h100
  text "锁检测" at 685,-1090 h100
  text "＋24V" at 8485,-1265 h100 r90
  text "DGND" at 4545,-1404.36 h60
  text "TCK" at 4545,-1499.36 h60
  text "TMS" at 4545,-1609.29 h60
  text "3.3V" at 4545,-1704.36 h60
  text "20V~" at 8320,-2573.94 h100
  text "COMB2" at 620,-2730 h60
  text "COMB1" at 620,-2780 h60
  text "常闭阀" at 2440,-2780 h100
  text "COMB" at 620,-2830 h60
  text "COMA2" at 620,-2875 h60
  text "常开阀" at 2440,-2875 h100
  text "COMA1" at 620,-2925 h60
  text "公共端1" at 2445,-2965 h100
  text "COMA" at 620,-2970 h60
  text "9V~" at 8395,-3083.81 h100
  text "GND" at 8315,-3335 h100
  text "9V~" at 8395,-3693.81 h100
  text "220VL" at 1885,-4329.36 h60
  text "制冷" at 975,-4330 h100
  text "风扇" at 1325,-4330 h100
  text "ADC-SENSE" at 3170,-4330 h60
  text "220VN" at 1585,-4334.36 h60
  text "HUM-SENSE" at 2810,-4335 h60
  text "电磁锁" at 2320,-4340 h80
  text "PT1000Ⅰ" at 4810,-4340 h80
  text "＋24V" at 5640,-4340 h100
  text "PT1000Ⅲ" at 3600,-4345 h80
  text "PT1000Ⅱ" at 4200,-4345 h80
  text "AGND" at 5205,-4345 h100

## Dimensions
0,0 to 9070,0 on Top Overlay
0,0 to 0,-4900 on Top Overlay

## Text inside footprints (layer, text, board x,y; h text height)
FM1: Top Overlay "+" at 2759,-3138 h30